# EAGLE board ukmarsbot-V1.0 (EAGLE 7.6.0)
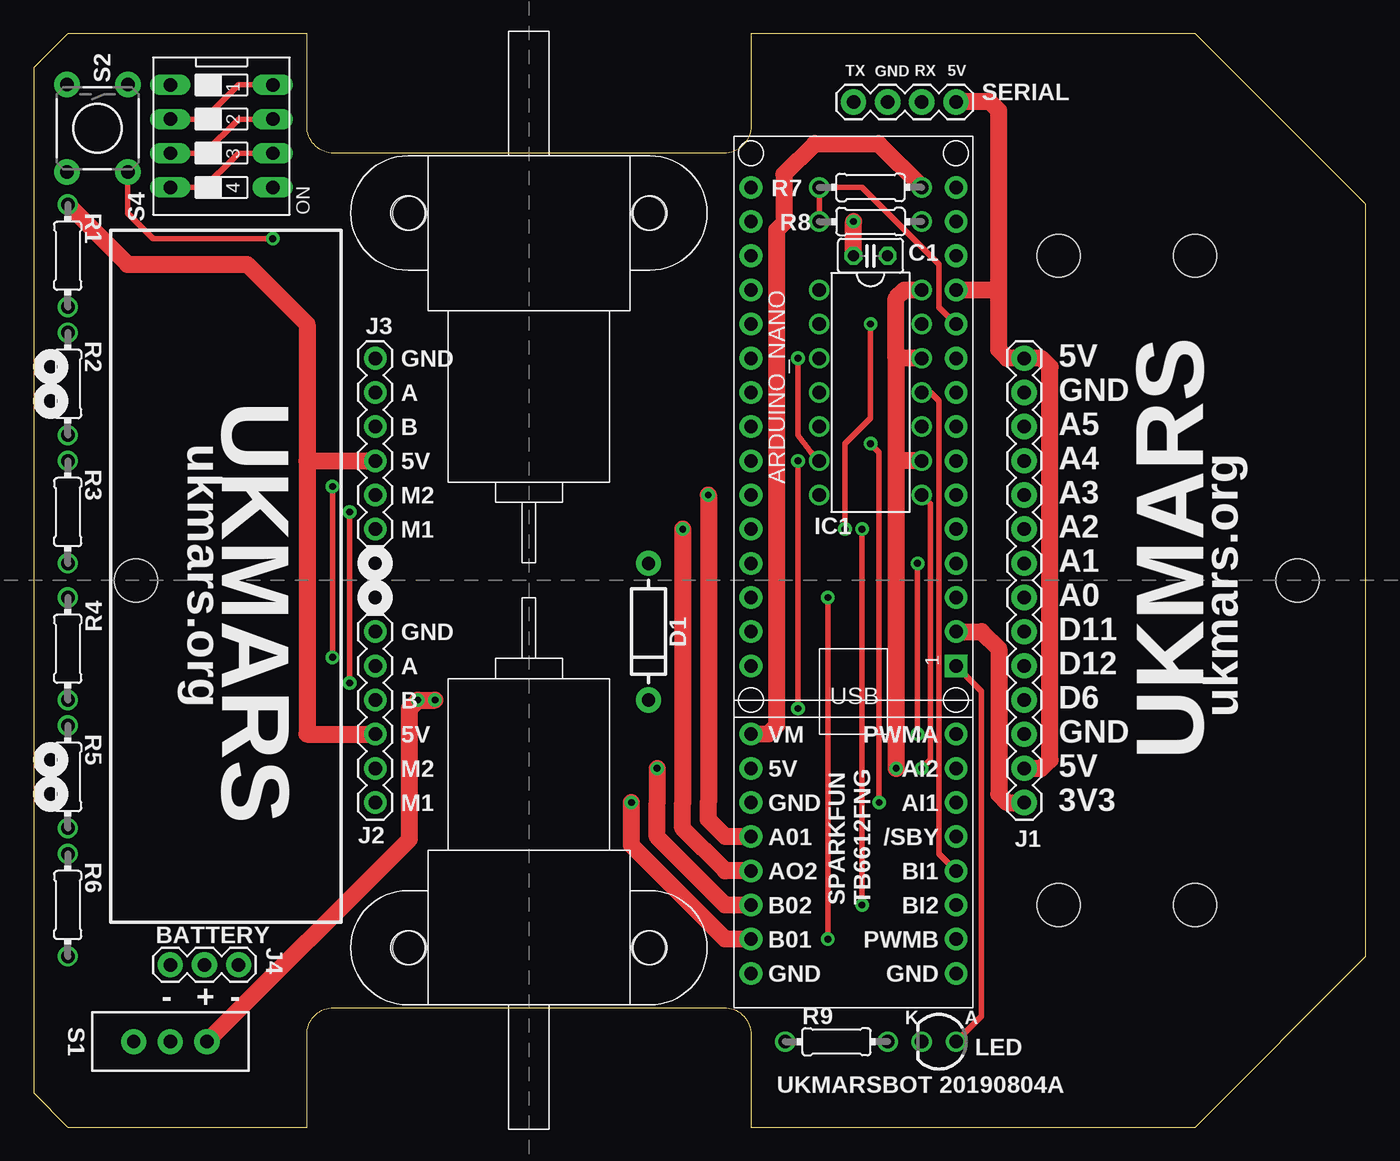
[diagram p0: board, top side]
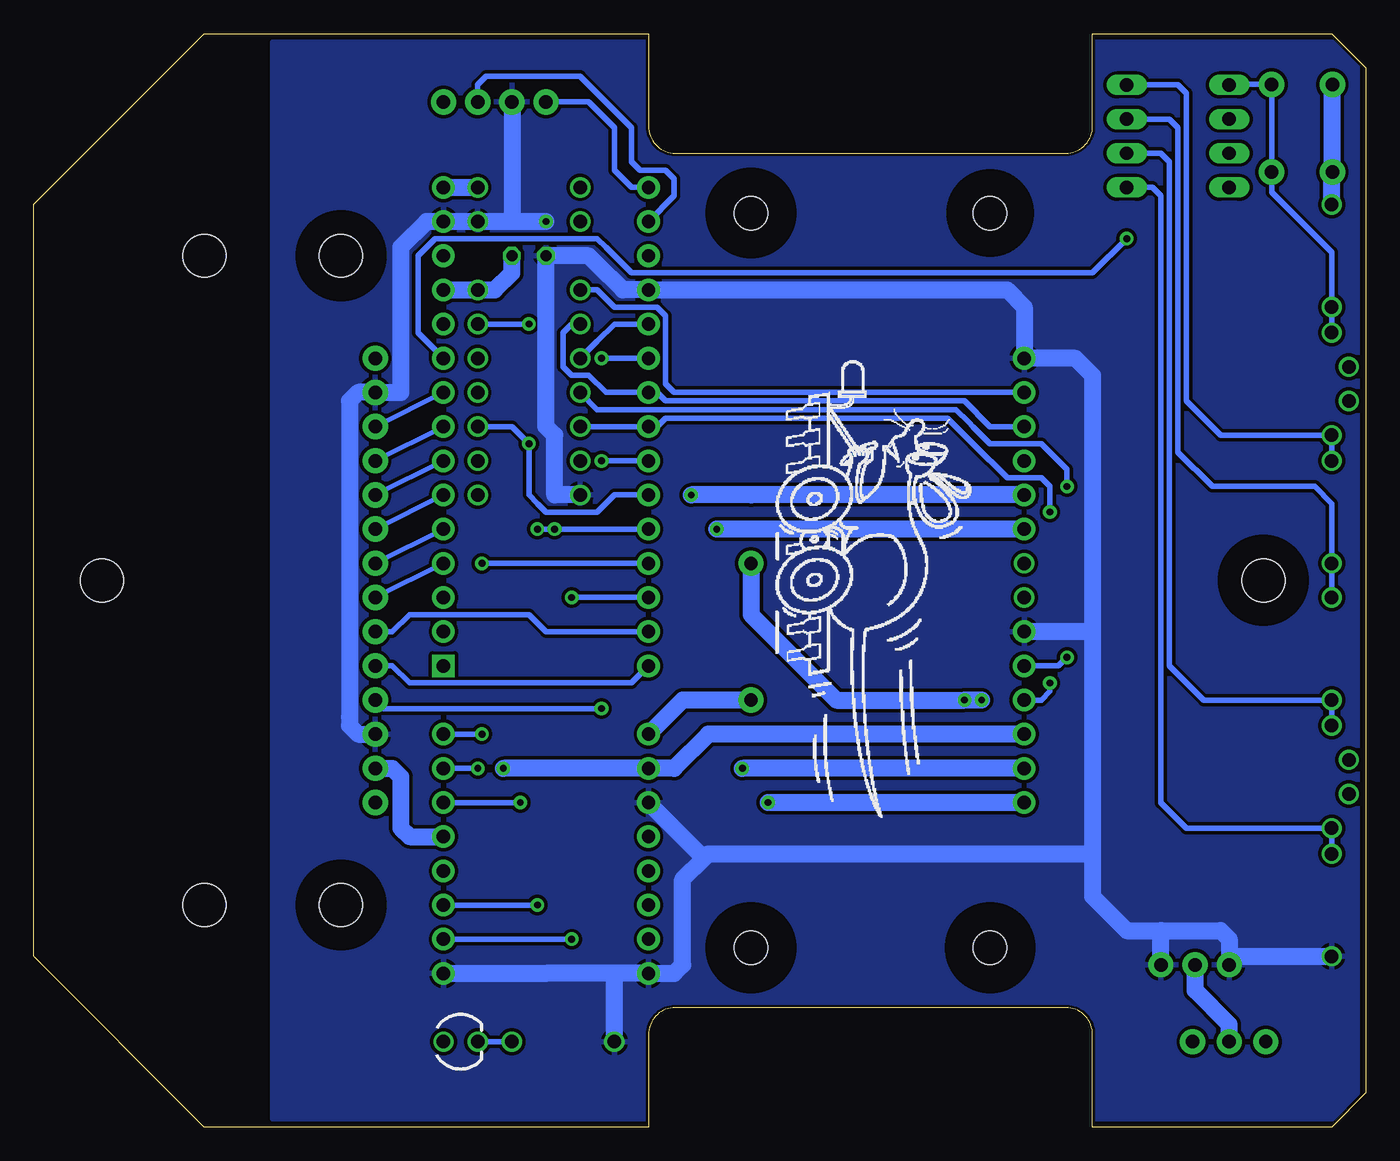
[diagram p1: board, bottom side, seen from below]

Size 99.06 x 81.28 mm. Coordinates in mm from the lower left corner, seen from the top.
Outline: 2.54,0 20.32,0 20.32,6.89 arc-90 22.32,8.89 51.34,8.89 arc-90 53.34,6.89 53.34,0 86.36,0 99.06,12.7 99.06,68.58 86.36,81.28 53.34,81.28 53.34,74.39 arc-90 51.34,72.39 22.32,72.39 arc-90 20.32,74.39 20.32,81.28 2.54,81.28 0,78.74 0,2.54 2.54,0
Copper layers (1*16): Top 0.035mm / dielectric 1.5mm / Bottom 0.035mm
Design rules "SparkFun-2-layer-STANDARD": minimum track width 10mil, minimum drill 20mil, track to track 10mil, track to pad 8mil, pad to pad 8mil, via to via 10mil, smd to smd 8mil, copper to edge 8mil, drill to drill 8mil, minimum pad ring 10mil, minimum via ring 10mil, stop-mask expansion 4mil, vias tented up to drill 25mil, thermal gap 10mil
Net classes: 0 default: width 0.406 mm, clearance 0.205 mm; 1 Power: width 1.27 mm, clearance 0.2 mm
Holes 3.2 mm at 86.36,64.77 86.36,16.51 76.2,16.51 76.2,64.77 93.98,40.64 7.62,40.64
Holes 2.5 mm at 27.94,67.94 45.72,67.94 27.94,13.34 45.72,13.34
tRestrict: area 24.9,65 to 31,71.1; area 42.5,64.8 to 48.9,71.1; area 24.8,10.2 to 31.1,16.5; area 42.5,10.2 to 48.9,16.5; area 83.2,13.3 to 89.5,19.7; area 73,13.3 to 79.4,19.7; area 90.8,37.5 to 97.2,43.8; area 73,61.6 to 79.4,67.9; area 83.2,61.6 to 89.5,67.9; area 4.4,37.5 to 10.8,43.8
bRestrict: area 24.8,10.2 to 31.1,16.5; area 42.5,10.2 to 48.9,16.5; area 24.9,64.9 to 31,71; area 42.5,64.8 to 48.9,71.1; area 73,61.6 to 79.4,67.9; area 83.2,61.6 to 89.5,67.9; area 90.8,37.5 to 97.2,43.8; area 83.2,13.3 to 89.5,19.7; area 73,13.3 to 79.4,19.7; area 4.4,37.5 to 10.8,43.8

## Footprints (pad centres in the part's own frame; a part is rotated, then mirrored left to right if it is on the bottom)
ARDUINO_NANO = drill 1 pad 1.676 square: 1 -20.32,-7.62 | drill 1 pad 1.676: 2 -17.78,-7.62; 3 -15.24,-7.62; 4 -12.7,-7.62; 5 -10.16,-7.62; 6 -7.62,-7.62; 7 -5.08,-7.62; 8 -2.54,-7.62; 9 0,-7.62; 10 2.54,-7.62; 11 5.08,-7.62; 12 7.62,-7.62; 13 10.16,-7.62; 14 12.7,-7.62; 15 15.24,-7.62; 16 15.24,7.62; 17 12.7,7.62; 18 10.16,7.62; 19 7.62,7.62; 20 5.08,7.62; 21 2.54,7.62; 22 0,7.62; 23 -2.54,7.62; 24 -5.08,7.62; 25 -7.62,7.62; 26 -10.16,7.62; 27 -12.7,7.62; 28 -15.24,7.62; 29 -17.78,7.62; 30 -20.32,7.62
C025-025X050 = drill 0.813 octagon: 1 -1.27,0; 2 1.27,0
DIODE-1N4001-KIT = drill 1 pad 1.88: A -5.08,0; C 5.08,0
DIL14 = drill 1: 1 -7.62,-3.81; 2 -5.08,-3.81; 3 -2.54,-3.81; 4 0,-3.81; 5 2.54,-3.81; 6 5.08,-3.81; 7 7.62,-3.81; 8 7.62,3.81; 9 5.08,3.81; 10 2.54,3.81; 11 0,3.81; 12 -2.54,3.81; 13 -5.08,3.81; 14 -7.62,3.81
1X14 = drill 1 pad 1.88: 1 0,0; 2 2.54,0; 3 5.08,0; 4 7.62,0; 5 10.16,0; 6 12.7,0; 7 15.24,0; 8 17.78,0; 9 20.32,0; 10 22.86,0; 11 25.4,0; 12 27.94,0; 13 30.48,0; 14 33.02,0
1X06 = drill 1 pad 1.676: 1 0,0; 2 2.54,0; 3 5.08,0; 4 7.62,0; 5 10.16,0; 6 12.7,0
1X03 = drill 1 pad 1.88: 1 0,0; 2 2.54,0; 3 5.08,0
LED_3MM = drill 1: A -1.27,0; K 1.27,0
0204/7 = drill 1: 1 -3.81,0; 2 3.81,0
SWITCH_SPDT_PTH_11.6X4.0MM_KIT = drill 1 pad 1.88: 1 0,2.718; 2 0,0; 3 0,-2.718
TACTILE_SWITCH_PTH_6.0MM = drill 1 pad 1.88: 1 -3.251,2.261; 2 3.251,2.261; 3 -3.251,-2.261; 4 3.251,-2.261
DS-04 = drill 1 long: 1 -3.81,-3.81; 2 -1.27,-3.81; 3 1.27,-3.81; 4 3.81,-3.81; 5 3.81,3.81; 6 1.27,3.81; 7 -1.27,3.81; 8 -3.81,3.81
1X04 = drill 1 pad 1.88: 1 0,0; 2 2.54,0; 3 5.08,0; 4 7.62,0
SPARKFUN-TB6612FNG = drill 1 pad 1.676: /STBY 7.62,2.54; A01 -7.62,2.54; A02 -7.62,0; AI1 7.62,5.08; AI2 7.62,7.62; B01 -7.62,-5.08; B02 -7.62,-2.54; BI1 7.62,0; BI2 7.62,-2.54; GND@1 -7.62,5.08; GND@2 -7.62,-7.62; GND@3 7.62,-7.62; PWMA 7.62,10.16; PWMB 7.62,-5.08; VCC -7.62,7.62; VM -7.62,10.16

## Placement (x,y rotation side)
ARDUINO_NANO  [ARDUINO_NANO]  60.96,54.61 90 top
C1  100n  [C025-025X050]  62.23,64.77 180 top
D1  1N5401/2/4  [DIODE-1N4001-KIT]  45.72,36.83 270 top
IC1  74LS86N  [DIL14]  62.23,54.61 270 top
J1  [1X14]  73.66,24.13 90 top
J2  [1X06]  25.4,36.83 270 top
J3  [1X06]  25.4,57.15 270 top
J4  [1X03]  15.24,12.06 180 top
LED  [LED_3MM]  67.31,6.35 180 top
R1  10k  [0204/7]  2.54,64.77 90 top
R2  10k  [0204/7]  2.54,55.24 90 top
R3  4k7  [0204/7]  2.54,45.72 90 top
R4  2k2  [0204/7]  2.54,35.56 90 top
R5  1k0  [0204/7]  2.54,26.04 90 top
R6  470  [0204/7]  2.54,16.51 90 top
R7  10k  [0204/7]  62.23,69.85 0 top
R8  10k  [0204/7]  62.23,67.31 180 top
R9  1k0  [0204/7]  59.69,6.35 0 top
S1  [SWITCH_SPDT_PTH_11.6X4.0MM_KIT]  10.16,6.35 90 top
S2  [TACTILE_SWITCH_PTH_6.0MM]  4.75,74.25 270 top
S4  [DS-04]  13.97,73.66 270 top
SERIAL  [1X04]  68.58,76.2 180 top
U$1  SPARKFUN-TB6612FNG  [SPARKFUN-TB6612FNG]  60.96,19.05 0 top
U$2  [MINI-METAL-GEARMOTOR-WITH-BRACKET]  36.83,13.34 0 top
U$3  [MINI-METAL-GEARMOTOR-WITH-BRACKET]  36.83,67.94 180 top
U$4  [CLASSIC-MAZE-CELL]  36.83,40.64 0 top

## Library data of the parts
ARDUINO_NANO C1 IC1 J1 R1-R9 S2 U$1-U$4 = ukmarsbot
D1 = ukmarsbot; PROD_ID: DIO-09176
J2 J3 = ukmarsbot; PROD_ID: CONN-08437
J4 = ukmarsbot; PROD_ID: XXX-00000; VALUE: 455-1750-1-ND
LED = ukmarsbot; PROD_ID: DIO-08794
S1 = ukmarsbot; PROD_ID: SWCH-08261; SF_SKU: COM-00102
S4 = ukmarsbot; OC_FARNELL: unknown; OC_NEWARK: unknown
SERIAL = ukmarsbot; PROD_ID: CONN-09696

## Nets
3V3 [Power]: ARDUINO_NANO.2 J1.1
5V [Power]: ARDUINO_NANO.12 C1.1 IC1.9 IC1.12 IC1.14 J1.2 J1.14 J2.4 J3.4 R1.2 S2.3 S2.4 SERIAL.1 U$1./STBY U$1.VCC
/LEFT_DIR: IC1.8 U$1.AI2
/RIGHT_DIR: IC1.11 U$1.BI1
BATTERY_VOLTS: ARDUINO_NANO.11 R7.1 R8.2
D13: ARDUINO_NANO.1 LED.A
EMITTER_A: ARDUINO_NANO.29 J1.6
EMITTER_B: ARDUINO_NANO.30 J1.5
FUNCTION_SELECT: ARDUINO_NANO.10 R1.1 R2.2 S2.1 S2.2 S4.1
GND [Power]: ARDUINO_NANO.14 ARDUINO_NANO.19 C1.2 IC1.7 J1.3 J1.13 J2.1 J3.1 J4.1 J4.3 R6.1 R8.1 R9.1 SERIAL.3 U$1.GND@1 U$1.GND@2 U$1.GND@3
LEFT_A: IC1.1 J3.2
LEFT_B: ARDUINO_NANO.22 IC1.2 J3.3
LEFT_CLK_A: ARDUINO_NANO.20 IC1.3
LEFT_DIR: ARDUINO_NANO.25 IC1.10 U$1.AI1
LEFT_MOTOR_1 [Power]: J3.5 U$1.A01
LEFT_MOTOR_2 [Power]: J3.6 U$1.A02
LEFT_PWM: ARDUINO_NANO.27 U$1.PWMA
N$1: ARDUINO_NANO.18
N$5: LED.K R9.2
N$7: R2.1 R3.2 S4.2 S4.8
N$8: R3.1 R4.2 S4.3 S4.7
N$9: R4.1 R5.2 S4.4 S4.6
N$10: R5.1 R6.2 S4.5
N$35 [Power]: J4.2 S1.2
N$36 [Power]: D1.A S1.3
RIGHT_A: IC1.4 J2.2
RIGHT_B: ARDUINO_NANO.23 IC1.5 J2.3
RIGHT_CLK_A: ARDUINO_NANO.21 IC1.6
RIGHT_DIR: ARDUINO_NANO.26 IC1.13 U$1.BI2
RIGHT_MOTOR_1 [Power]: J2.6 U$1.B01
RIGHT_MOTOR_2 [Power]: J2.5 U$1.B02
RIGHT_PWM: ARDUINO_NANO.28 U$1.PWMB
RXD: ARDUINO_NANO.17 SERIAL.2
SENSOR_0: ARDUINO_NANO.4 J1.7
SENSOR_1: ARDUINO_NANO.5 J1.8
SENSOR_2: ARDUINO_NANO.6 J1.9
SENSOR_3: ARDUINO_NANO.7 J1.10
SENSOR_4: ARDUINO_NANO.8 J1.11
SENSOR_5: ARDUINO_NANO.9 J1.12
TXD: ARDUINO_NANO.16 SERIAL.4
USER_IO: ARDUINO_NANO.24 J1.4
V_BATT [Power]: ARDUINO_NANO.15 D1.C R7.2 U$1.VM

## Tracks (layer width: path | path; a pad name or v marks a point on that pad's centre or on a via)
3V3
  Top 1.27: ARDUINO_NANO.2 70.48,36.83 71.75,35.56 71.75,24.77 72.39,24.13 J1.1
5V  (via drill 0.5 pad 0.61)
  Top 1.27: R1.2 6.99,64.14 15.88,64.14 20.32,59.69 20.32,49.53 | 20.32,49.53 20.32,29.21 J2.4 | 20.32,49.53 J3.4 | J1.2 74.93,26.67 75.56,27.3 75.56,56.52 74.93,57.15 J1.14 72.39,57.15 71.75,57.78 71.75,62.23 | 71.75,62.23 71.75,75.56 71.12,76.2 SERIAL.1 | ARDUINO_NANO.12 71.75,62.23 | 64.14,57.15 64.14,49.53 | 64.14,49.53 64.14,29.21 v64.14,26.67 | IC1.12 64.14,57.15 | IC1.9 64.14,49.53 | 64.14,57.15 64.14,61.59 64.77,62.23 IC1.14
  Bottom 1.27: ARDUINO_NANO.12 IC1.14 64.77,62.23 63.5,63.5 C1.1 | J1.2 72.39,26.67 71.75,26.04 71.75,22.23 71.12,21.59 U$1./STBY | v64.14,26.67 U$1.VCC 51.44,26.67 48.9,29.21 J2.4 | R1.2 2.54,70.95 S2.4 S2.3
/LEFT_DIR  (via drill 0.5 pad 0.61)
  Top 0.406: IC1.8 66.67,46.35 66.67,27.3 v66.04,26.67
  Bottom 0.406: v66.04,26.67 U$1.AI2
/RIGHT_DIR
  Top 0.406: IC1.11 66.67,54.61 67.31,53.98 67.31,43.18 67.31,20.32 U$1.BI1
BATTERY_VOLTS
  Top 0.406: R8.2 R7.1 61.59,69.85 62.23,69.22 67.31,64.14 67.31,60.96 ARDUINO_NANO.11
D13
  Top 0.406: ARDUINO_NANO.1 70.48,32.38 70.48,8.26 LED.A
EMITTER_A
  Bottom 0.406: J1.6 72.39,36.83 71.12,38.1 62.23,38.1 60.96,36.83 ARDUINO_NANO.29
EMITTER_B
  Bottom 0.406: J1.5 72.39,34.29 71.12,33.02 54.61,33.02 ARDUINO_NANO.30
FUNCTION_SELECT  (via drill 0.5)
  Top 0.406: v17.78,66.04 8.89,66.04 7.62,67.31 7.01,67.92 S2.2
  Bottom 0.406: R2.2 R1.1 2.54,63.5 2.54,65.04 7,69.5 7,70.99 S2.2 S2.1 10.13,77.5 S4.1 | v17.78,66.04 20.32,63.5 50.8,63.5 53.98,63.5 54.61,63.5 56.52,65.41 57.15,66.04 67.94,66.04 69.22,66.04 70.48,64.77 70.48,59.05 ARDUINO_NANO.10
GND  (via drill 0.5)
  Top 1.27: C1.2 v60.96,67.31
  Bottom 1.27: 55.88,11.43 U$1.GND@2 51.44,11.43 50.8,12.06 50.8,18.41 49.21,20 | 55.88,11.43 60.96,11.43 U$1.GND@3 | R6.1 9.53,12.7 J4.3 10.16,13.97 10.79,14.61 15.24,14.61 | 20.32,36.83 20.32,55.88 21.59,57.15 J3.1 25.4,60.96 26.67,62.23 ARDUINO_NANO.19 55.24,62.23 57.15,64.14 57.78,64.77 C1.2 60.96,52.07 60.33,51.44 60.33,46.99 IC1.7 | 20.32,36.83 20.32,20.32 | 20.32,20.32 20.32,17.14 17.78,14.61 15.24,14.61 | J4.1 15.24,14.61 | 20.32,36.83 J2.1 | 49.21,20 48.9,20.32 20.32,20.32 | U$1.GND@1 49.21,20 | 63.5,67.31 R8.1 ARDUINO_NANO.14 69.85,67.31 71.75,65.41 71.75,54.61 J1.13 74.93,54.61 75.56,53.98 75.56,30.48 75.56,29.84 74.93,29.21 J1.3 | SERIAL.3 63.5,67.31 | R9.1 55.88,11.43 | v60.96,67.31 63.5,67.31
  pour Bottom: 0.64,80.64 81.28,80.64 81.28,0.64 0.64,0.64
LEFT_A
  Bottom 0.406: J3.2 28.57,54.61 51.44,54.61 52.07,55.24 52.07,55.88 52.07,60.33 52.7,60.96 55.88,60.96 57.15,62.23 IC1.1
LEFT_B
  Bottom 0.406: J3.3 27.3,52.07 27.94,52.07 29.84,53.98 52.07,53.98 52.7,54.61 ARDUINO_NANO.22 56.52,54.61 57.78,55.88 59.05,55.88 59.69,56.52 59.69,59.05 59.05,59.69 IC1.2
LEFT_CLK_A
  Bottom 0.406: IC1.3 57.15,58.42 55.88,59.69 ARDUINO_NANO.20
LEFT_DIR  (via drill 0.5 pad 0.61)
  Top 0.406: v62.87,24.13 62.87,24.77 62.87,50.16 v62.23,50.8
  Bottom 0.406: U$1.AI1 v62.87,24.13 | ARDUINO_NANO.25 55.88,46.99 57.15,45.72 60.96,45.72 61.59,46.35 62.23,46.99 v62.23,50.8 63.5,52.07 64.14,52.07 IC1.10
LEFT_MOTOR_1  (via drill 0.5 pad 0.61)
  Top 1.27: U$1.A01 51.44,21.59 50.16,22.86 50.16,24.13 v50.16,46.99
  Bottom 1.27: J3.5 45.72,46.99 v50.16,46.99
LEFT_MOTOR_2  (via drill 0.5 pad 0.61)
  Top 1.27: U$1.A02 51.44,19.05 48.26,22.23 48.26,24.13 v48.26,44.45
  Bottom 1.27: J3.6 45.72,44.45 v48.26,44.45
LEFT_PWM  (via drill 0.5 pad 0.61)
  Top 0.406: v65.72,29.21 v65.72,41.91
  Bottom 0.406: ARDUINO_NANO.27 v65.72,41.91 | U$1.PWMA v65.72,29.21
N$4  (via drill 1 pad 0.61)
  other vias: 1.27,56.52
N$5
  Bottom 0.406: R9.2 LED.K
N$6  (via drill 1 pad 0.61)
  other vias: 1.27,24.77
N$7
  Top 0.406: S4.2 12.7,74.93 15.24,77.47 S4.8
  Bottom 0.406: R3.2 R2.1 10.79,51.44 13.34,53.98 13.34,64.77 13.34,68.58 13.34,76.83 13.97,77.47 S4.8
N$8
  Top 0.406: S4.3 12.7,72.39 15.24,74.93 S4.7
  Bottom 0.406: R4.2 R3.1 2.54,46.35 3.81,47.62 11.43,47.62 13.97,50.16 13.97,64.77 13.97,68.58 13.97,74.3 14.61,74.93 S4.7
N$9
  Top 0.406: S4.4 12.7,69.85 14.92,72.07 15.24,72.39 S4.6
  Bottom 0.406: R5.2 R4.1 12.06,31.75 14.61,34.29 14.61,64.77 14.61,68.58 14.61,71.75 15.24,72.39 S4.6
N$10
  Bottom 0.406: R6.2 R5.1 13.34,22.23 15.24,24.13 15.24,64.77 15.24,68.58 15.24,69.22 15.88,69.85 S4.5
N$11  (via drill 1 pad 0.61)
  other vias: 1.27,53.98
N$12  (via drill 1 pad 0.61)
  other vias: 1.27,27.3
N$13  (via drill 1 pad 0.61)
  other vias: 25.4,41.91
N$15  (via drill 1 pad 0.61)
  other vias: 25.4,39.37
N$35
  Bottom 1.27: S1.2 10.16,7.62 12.7,10.16 J4.2
N$36  (via drill 0.5, 0.5 pad 0.61)
  Top 1.27: S1.3 27.94,21.41 27.94,24.77 27.94,29.84 27.94,31.11 v28.57,31.75 v29.84,31.75
  Bottom 1.27: v28.57,31.75 v29.84,31.75 39.37,31.75 45.72,38.1 D1.A
RIGHT_A  (via drill 0.5)
  Top 0.406: v22.23,47.62 v22.23,34.92
  Bottom 0.406: 29.53,52.39 30.48,53.34 49.53,53.34 57.15,53.34 IC1.4 | 29.53,52.39 29.21,52.07 | 29.21,52.07 29.53,52.39 | 29.21,52.07 27.94,50.8 24.13,50.8 22.86,49.53 22.23,48.9 v22.23,47.62 | v22.23,34.92 22.86,34.29 J2.2
RIGHT_B  (via drill 0.5)
  Top 0.406: v23.5,45.72 v23.5,33.02
  Bottom 0.406: IC1.5 ARDUINO_NANO.23 52.7,52.07 52.07,52.7 31.11,52.7 29.21,50.8 26.67,48.26 24.13,48.26 23.5,47.62 v23.5,45.72 | v23.5,33.02 23.5,32.38 24.13,31.75 J2.3
RIGHT_CLK_A  (via drill 0.5 pad 0.61)
  Top 0.406: v56.83,57.15 56.83,51.44 57.78,50.16 IC1.6
  Bottom 0.406: v56.83,57.15 ARDUINO_NANO.21
RIGHT_DIR  (via drill 0.5, 0.5 pad 0.61)
  Top 0.406: v61.59,16.51 v61.59,44.45 | v60.33,44.45 60.33,50.8 62.23,52.7 v62.23,59.69
  Bottom 0.406: U$1.BI2 v61.59,16.51 | ARDUINO_NANO.26 v60.33,44.45 60.96,44.45 v61.59,44.45 | IC1.13 v62.23,59.69
RIGHT_MOTOR_1  (via drill 0.5 pad 0.61)
  Top 1.27: U$1.B01 51.44,13.97 46.35,19.05 44.45,20.95 v44.45,24.13
  Bottom 1.27: J2.6 v44.45,24.13
RIGHT_MOTOR_2  (via drill 0.5 pad 0.61)
  Top 1.27: U$1.B02 51.44,16.51 46.35,21.59 46.35,24.13 v46.35,26.67
  Bottom 1.27: J2.5 v46.35,26.67
RIGHT_PWM  (via drill 0.5 pad 0.61)
  Top 0.406: v59.05,39.37 v59.05,13.97
  Bottom 0.406: U$1.PWMB v59.05,13.97 | ARDUINO_NANO.28 55.88,39.37 v59.05,39.37
RXD
  Bottom 0.406: ARDUINO_NANO.17 51.44,69.22 51.44,70.48 52.07,71.12 53.98,71.12 54.61,71.75 54.61,74.3 58.42,78.11 65.41,78.11 66.04,77.47 SERIAL.2
SENSOR_0
  Bottom 0.406: ARDUINO_NANO.4 J1.7
SENSOR_1
  Bottom 0.406: ARDUINO_NANO.5 J1.8
SENSOR_2
  Bottom 0.406: ARDUINO_NANO.6 J1.9
SENSOR_3
  Bottom 0.406: ARDUINO_NANO.7 J1.10
SENSOR_4
  Bottom 0.406: ARDUINO_NANO.8 J1.11
SENSOR_5
  Bottom 0.406: ARDUINO_NANO.9 J1.12
TXD
  Bottom 0.406: ARDUINO_NANO.16 54.61,69.85 55.88,71.12 55.88,74.3 57.78,76.2 SERIAL.4
USER_IO  (via drill 0.5)
  Top 0.406: v56.83,49.53 v56.83,31.11
  Bottom 0.406: J1.4 73.03,31.11 v56.83,31.11 | ARDUINO_NANO.24 v56.83,49.53
V_BATT
  Top 1.27: R7.2 66.03,69.9 62.82,73.11 58.08,73.11 55.79,70.82 55.79,67.22 55.24,66.67 55.24,35.56 55.24,29.84 54.61,29.21 U$1.VM
  Bottom 1.27: ARDUINO_NANO.15 R7.2 | D1.C 50.8,31.75 U$1.VM

## Text on the board
tPlace: TX | GND | RX | 5V | GND | 5V | UKMARS | A | GND | ukmars.org | B | A5 | 5V | A4 | M2 | A3 | M1 | A2 | A1 | A0 | GND | D11 | A | D12 | B | D6 | ukmars.org | 5V | GND | UKMARS | M2 | 5V | M1 | 3V3 | SPARKFUN / TB6612FNG | - | + | - | K | A
tNames: PWMA | VM | AI2 | 5V | AI1 | GND | /SBY | A01 | BI1 | AO2 | BI2 | B02 | PWMB | BATTERY | B01 | GND | GND | UKMARSBOT 20190804A